# Altium PCB sdram_rev_shield.PcbDoc
Units mm, origin at the board's own origin, x right, y up, seen from the top; angles counter-clockwise.
Board outline 22.86 x 50.8 mm, 2 copper layers (Top Layer, Bottom Layer); 1 components, 1 nets, 52 pads, 0 vias.
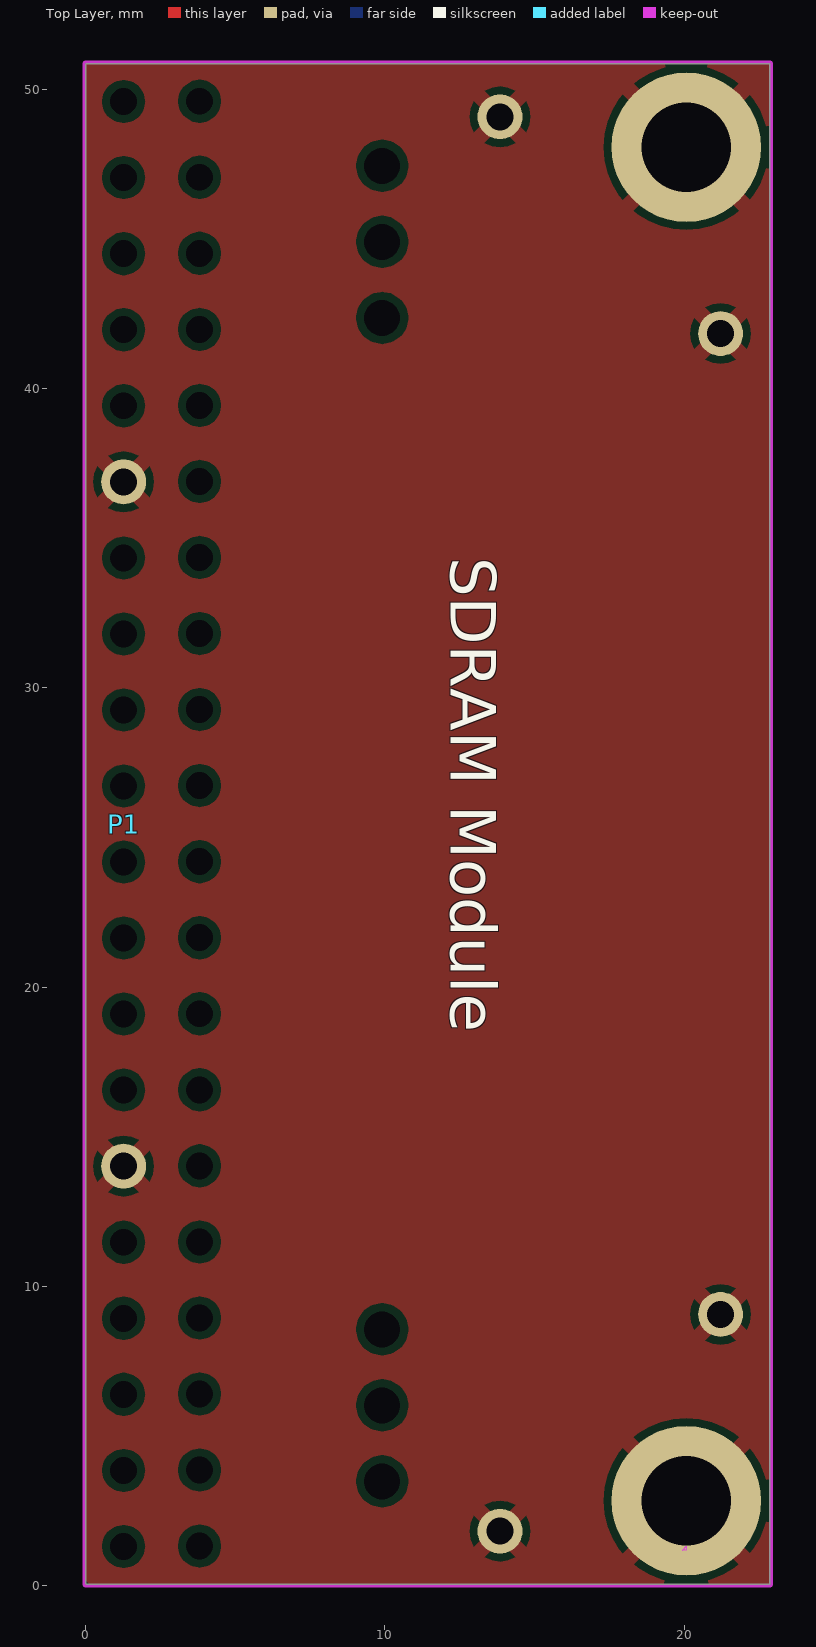
[diagram p0: Top Layer view]
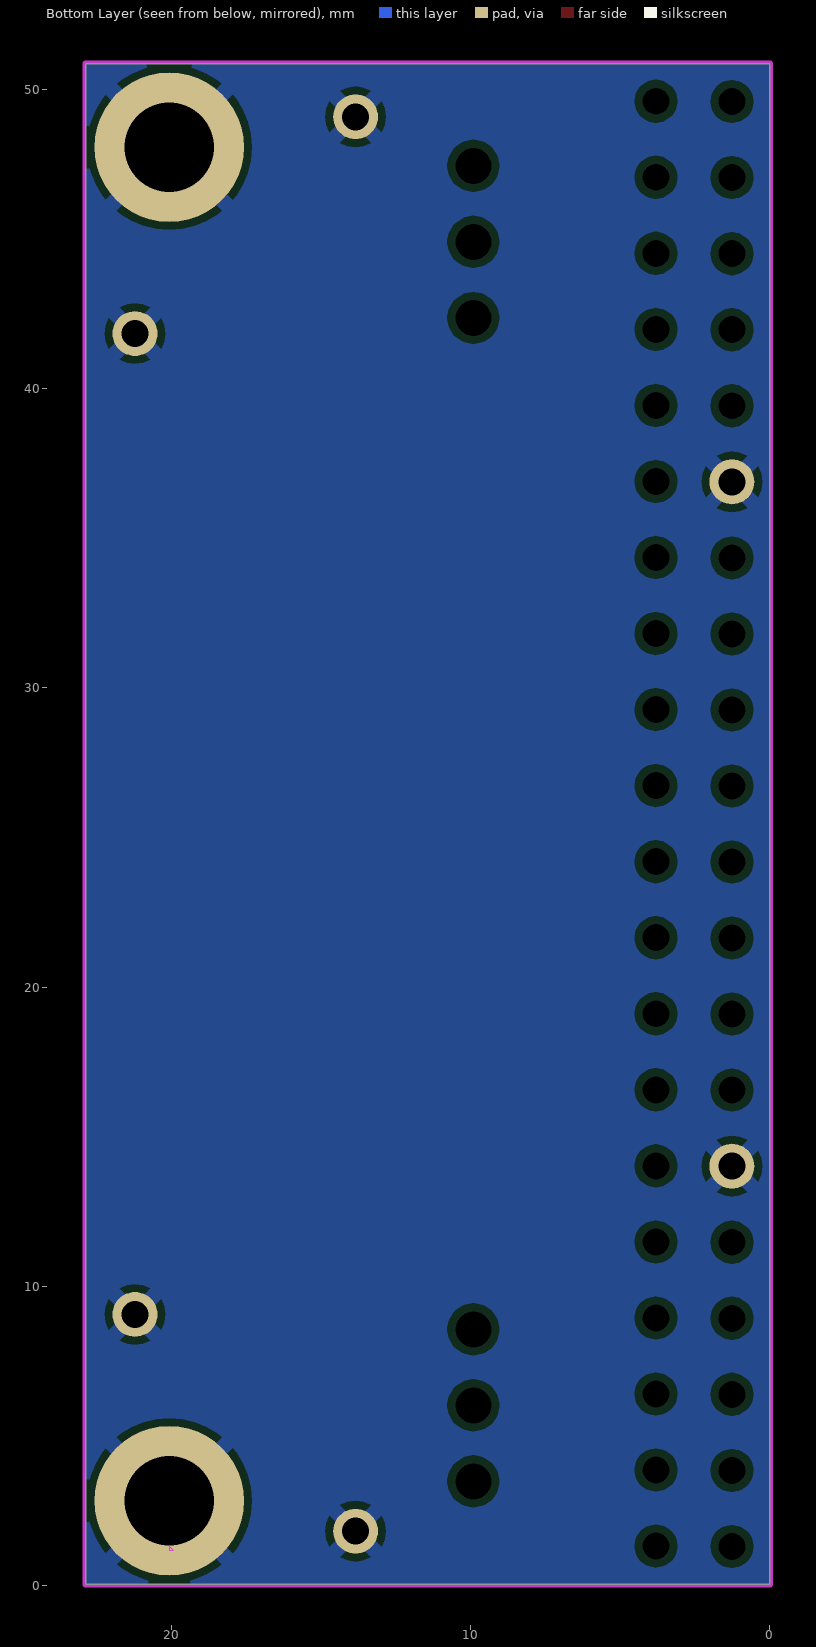
[diagram p1: Bottom Layer view, seen from below]

## Layer stack, top to bottom
Top Solder: solder mask 0.0102, Solder Resist, Dk 3.5
Top Layer: signal copper 0.0356
Dielectric 1: dielectric 0.32, FR-4, Dk 4.8
Bottom Layer: signal copper 0.0356
Bottom Solder: solder mask 0.0102, Solder Resist, Dk 3.5

## Board outline
0,50.85 0,0.05 22.86,0.05 22.86,50.85

## Design rules (kind name [scope] priority, off if disabled: settings)
BoardOutlineClearance [All] p1: gap=0 ignorepadtopadclearanceinfootprint=FALSE
Clearance keep-out_clearance [InNamedPolygon('ground') vs OnLayer('Keep-Out Layer')] p1: gap=0 ignorepadtopadclearanceinfootprint=FALSE
Clearance [All] p2: gap=0.254 ignorepadtopadclearanceinfootprint=TRUE except(0: Arc-Hole Track-Hole SMDPad-Hole THPad-Hole Via-Hole Fill-Hole Poly-Hole Region-Hole Text-Hole)
ComponentClearance [All] p1 off: gap=0.254 collisioncheckmode=3 verticalgap=0.254 showdistances=FALSE
Height [All] p1 off: minheight=0 maxheight=25.4 prefheight=12.7
HoleSize [All] p1: absolutevalues=TRUE maxlimit=6 minlimit=0.025 maxpercent=80.000 minpercent=20.000
MinimumSolderMaskSliver [All] p1: minsoldermaskwidth=0.25
PolygonConnect [All] p1: connectstyle=Relief reliefconductorwidth=0.508 reliefentries=4 polygonreliefangle="45 Angle" airgapwidth=0.254
RoutingVias [All] p1: holewidth=0.4 width=1 viastyle="Through Hole" minholewidth=0.4 minwidth=1 maxholewidth=0.4 maxwidth=1
SilkToSolderMaskClearance [IsPad] p1: minsilkscreentomaskgap=0.127 clearancetoexposedcopper=TRUE
SolderMaskExpansion SolderMaskExpansion_U1 [InComponent('U1')] p1: expansion=0
SolderMaskExpansion [All] p2: expansion=0.051
Width Width_power [InNetClass('power')] p1: maxlimit=2 minlimit=0.254 preferedwidth=0.508 minimp=50.000000 maximp=50.000000 favimp=50.000000
Width Width_signal [All] p2: maxlimit=0.254 minlimit=0.254 preferedwidth=0.254
25 further rules are at their usual default settings.

## Classes and differential pairs
net class power: GND

## Components (designator, comment, footprint, x,y, rotation, side; value= is the part's Value field where it differs from the comment)
P1 "Header 20" HDR1X20 1.27,1.32 r90 top

## Footprints (in the part's own frame and the unit in brackets; to place one, negate y for a bottom-side part, rotate by r counter-clockwise, add the part's x,y. Pads: shape width x height; smd on the part's side, far side on the other; paste and mask are expansions set on the pad)
HDR1X20 [mm] "Connector; Header; 20 Position"
  round 0 hole 0.9 unplated mask-0.9: 1(0,0) 2(2.54,0) 3(5.08,0) 4(7.62,0) 5(10.16,0) 7(15.24,0) 8(17.78,0) 9(20.32,0) 10(22.86,0) 11(25.4,0) 12(27.94,0) 13(30.48,0) 14(33.02,0) 16(38.1,0) 17(40.64,0) 18(43.18,0) 19(45.72,0) 20(48.26,0)
  round 1.5 hole 0.9: 6(12.7,0) 15(35.56,0)

## Part data
P1: "Header, 20-Pin", LatestRevisionDate=17-Jul-2002, LatestRevisionNote="Re-released for DXP Platform.", Publisher="Altium Limited"

## Free pads (board coordinates)
  round 1.5 hole 0.9: 8(21.209,9.067) ""(13.843,1.828) ""(13.843,49.072) ""(21.209,41.833)
  round 5 hole 3: M3(20.066,2.844) M3(20.066,48.056)
  round 0 hole 0.9 unplated mask-0.9: ""(3.81,1.332) ""(3.81,3.872) ""(3.81,6.412) ""(3.81,8.952) ""(3.81,11.492) ""(3.81,14.032) ""(3.81,16.572) ""(3.81,19.112) ""(3.81,21.652) ""(3.81,24.192) ""(3.81,26.732) ""(3.81,29.272) ""(3.81,31.812) ""(3.81,34.352) ""(3.81,36.892) ""(3.81,39.432) ""(3.81,41.972) ""(3.81,44.512) ""(3.81,47.052) ""(3.81,49.592)
  round 0 hole 1.2 unplated mask-1.2: ""(9.906,3.491) ""(9.906,6.031) ""(9.906,8.571) ""(9.906,42.353) ""(9.906,44.893) ""(9.906,47.433)

## Nets (pads, with @x,y where several pads share a name; then routed paths per layer and width w, separated by ;. In a path a pad name is that pad's centre, name@x,y a point inside that pad or via, vN(x,y) a via of type N, cw(c..) or ccw(c..) an arc to the next point about the centre after c; other vN are vias at no path point)
GND: P1.6 P1.15 pad.8 pad.@13.843,1.828 pad.@13.843,49.072 pad.@21.209,41.833 pad.M3
pads on no net: P1.1 P1.2 P1.3 P1.4 P1.5 P1.7 P1.8 P1.9 P1.10 P1.11 P1.12 P1.13 P1.14 P1.16 P1.17 P1.18 P1.19 P1.20

## Polygon pours and split planes (outlines as drawn)
GND on Bottom Layer "ground" (solid, remove dead copper, pour order 8): 0,50.857 22.86,50.832 22.86,0 0,0 0,38.162
GND on Top Layer "ground" (solid, pour order 16): 2.49,0.062 0,0.062 0,50.846 2.49,50.846 2.49,50.862 22.848,50.862 22.86,50.85 22.86,0.062

## Keep-outs
Keep-Out Layer:
  pour cut-out: 19.939,1.193 20.066,1.32 20.066,1.193
  lines w0.1: -0.05,0.05 ccw(c0,0.05) 0,0 ; -0.05,0.05 ccw(c0,0.05) 0,0 ; -0.05,0.05 -0.05,50.85 ; -0.05,50.85 cw(c0,50.85) 0,50.9 ; -0.05,50.85 cw(c0,50.85) 0,50.9 ; 0,0 22.86,0 ; 0,50.9 22.86,50.9 ; 22.86,0 ccw(c22.86,0.05) 22.91,0.05 ; 22.86,0 ccw(c22.86,0.05) 22.91,0.05 ; 22.86,50.9 cw(c22.86,50.85) 22.91,50.85 ; 22.86,50.9 cw(c22.86,50.85) 22.91,50.85 ; 22.91,0.05 22.91,50.85

## Silkscreen, mask and mechanical layers (free items; w line width, h text height)
Top Overlay:
  text "SDRAM Module" at 12.192,34.352 h1.52 r270